# Altium PCB driverv7-FPGA.PcbDoc
Units mm, origin at the board's own origin, x right, y up, seen from the top; angles counter-clockwise.
Board outline 31.75 x 21.95 mm, 2 copper layers (Top Layer, Bottom Layer); 44 components, 33 nets, 159 pads, 50 vias.
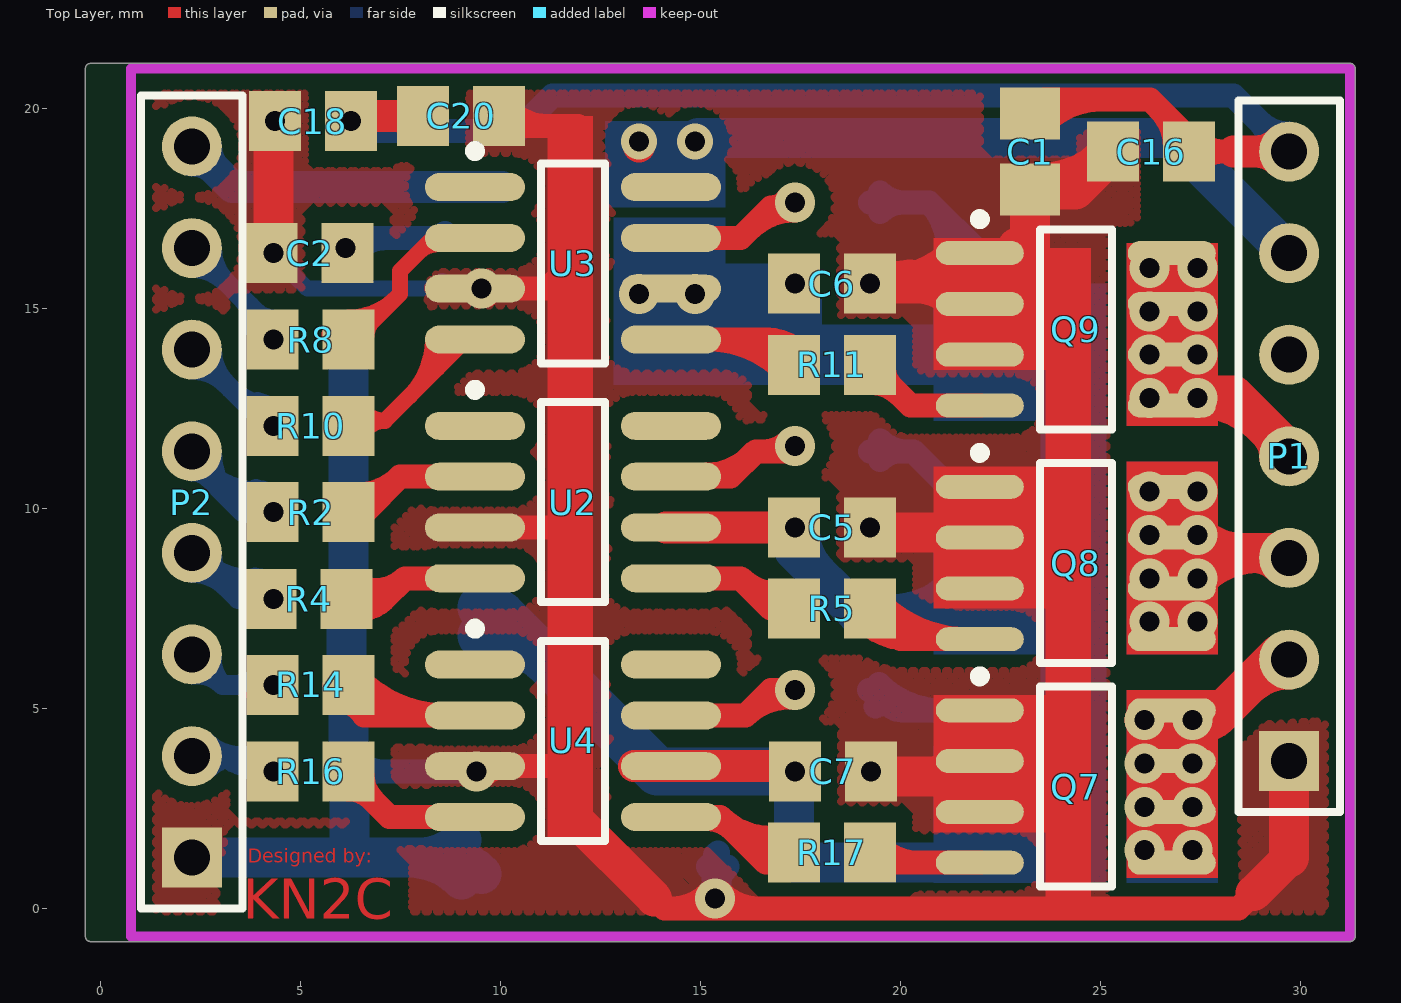
[diagram p0: Top Layer view]
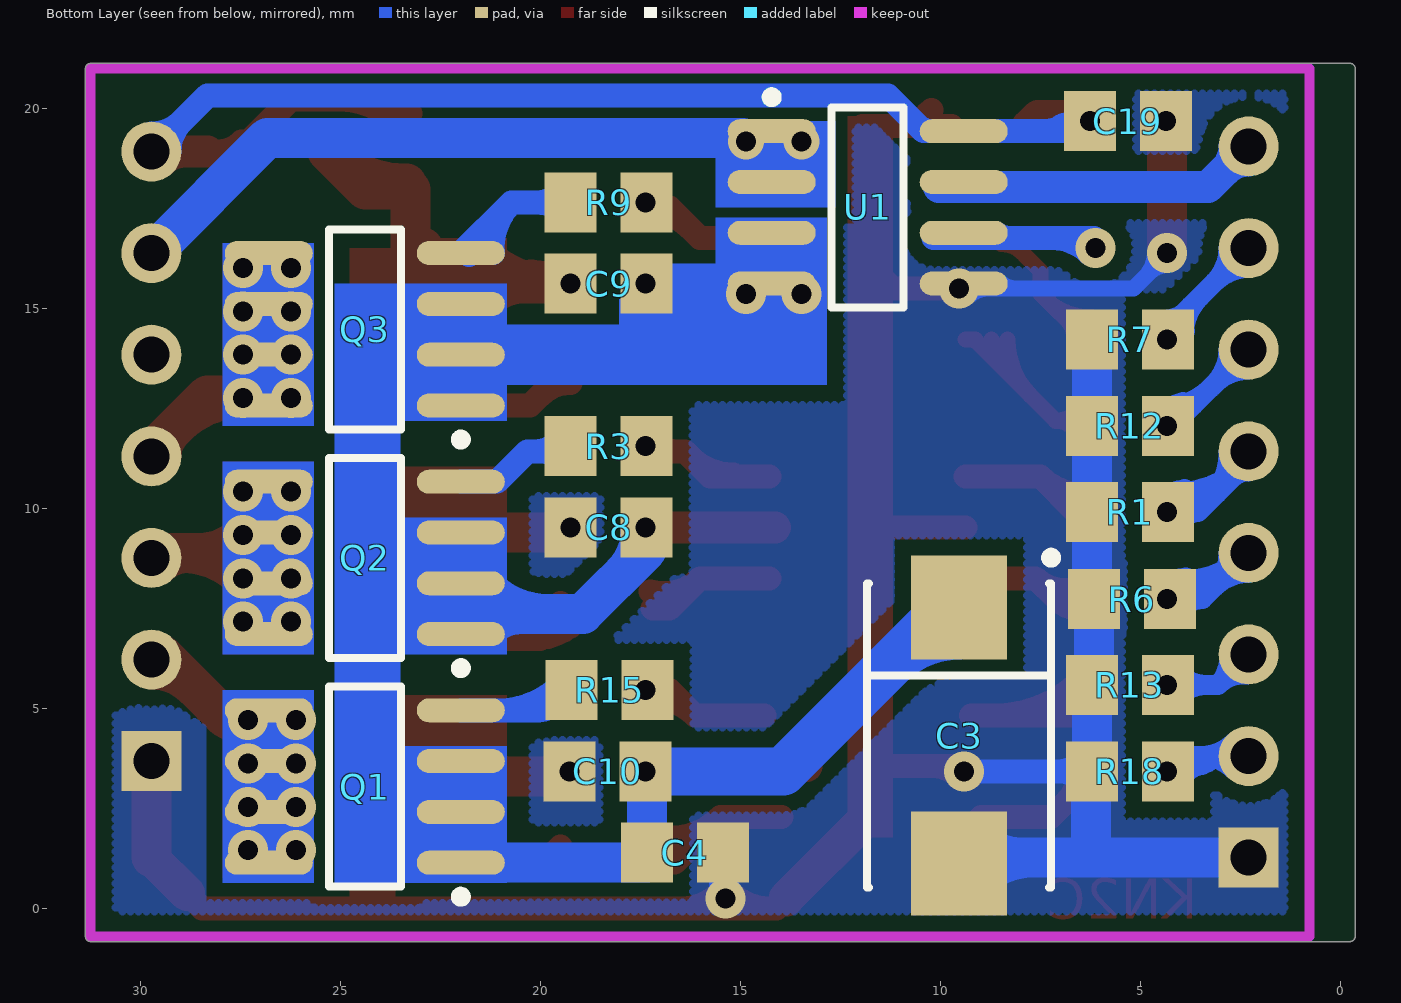
[diagram p1: Bottom Layer view, seen from below]

## Layer stack, top to bottom
Top Solder: solder mask 0.0102, Solder Resist, Dk 3.5
Top Layer: signal copper 0.0356
Dielectric1: dielectric 0.32, FR-4, Dk 4.8
Bottom Layer: signal copper 0.0356
Bottom Solder: solder mask 0.0102, Solder Resist, Dk 3.5

## Board outline
-0.377,-0.7 -0.377,20.955 cw(c-0.25,20.955) -0.375,20.978 -0.375,20.977 cw(c-0.25,21) -0.25,21.127 31.242,21.127 cw(c31.242,21) 31.369,21 31.369,-0.7 cw(c31.242,-0.7) 31.242,-0.827 -0.25,-0.827 cw(c-0.25,-0.7)

## Design rules (kind name [scope] priority, off if disabled: settings)
Clearance Clearance_1 [InPolygon] p1: gap=0.4
Clearance [All] p2: gap=0.2
PolygonConnect [All] p1: connectstyle=Direct reliefconductorwidth=0.254 reliefentries=4 polygonreliefangle="90 Angle" airgapwidth=0.254
RoutingVias [All] p1: holewidth=0.5 width=1 viastyle="Through Hole" minholewidth=0.5 minwidth=1 maxholewidth=0.711 maxwidth=1.27
SolderMaskExpansion [All] p1: expansion=0.102
Width Width_1 [All] p1: maxlimit=3 minlimit=0.2 preferedwidth=0.4
29 further rules are at their usual default settings.

## Components (designator, comment, footprint, x,y, rotation, side; value= is the part's Value field where it differs from the comment)
C1 "Cap_UP" 2012[0805] 23.241,18.923 r270 top
C2 "Cap_UP" 2012[0805] 5.232,16.383 r180 top
C3 "Cap_El_200V" 7343 9.525,4.318 r270 bottom
C4 "Cap_UP" 2012[0805] 16.383,1.397 r0 bottom
C5 "Cap_UP" 2012[0805] 18.288,9.525 r180 top
C6 "Cap_UP" 2012[0805] 18.288,15.621 r180 top
C7 "Cap_UP" 2012[0805] 18.313,3.429 r180 top
C8 "Cap_UP" 2012[0805] 18.288,9.525 r180 bottom
C9 "Cap_UP" 2012[0805] 18.288,15.621 r180 bottom
C10 "Cap_UP" 2012[0805] 18.313,3.429 r180 bottom
C16 "Cap_UP" 2012[0805] 26.264,18.923 r0 top
C18 "Cap_UP" 2012[0805] 5.309,19.685 r0 top
C19 "Cap_UP" 2012[0805] 5.309,19.685 r0 bottom
C20 "Cap_UP" 2012[0805] 9.017,19.812 r180 top
P1 "Header 7" HDR1X7 29.718,3.683 r90 top
P2 "Header 8" HDR1X8 2.286,1.27 r90 top
Q1 "MOSFET-P-8PIN" SO-8_N 24.384,3.048 r0 bottom
Q2 "MOSFET-P-8PIN" SO-8_N 24.384,8.763 r0 bottom
Q3 "MOSFET-P-8PIN" SO-8_N 24.384,14.478 r0 bottom
Q7 "MOSFET-N-8PIN" SO-8_N 24.384,3.048 r0 top
Q8 "MOSFET-N-8PIN" SO-8_N 24.384,8.636 r0 top
Q9 "MOSFET-N-8PIN" SO-8_N 24.384,14.478 r0 top
R1 "Res" 2012[0805] 5.257,9.906 r0 bottom
R2 "Res" 2012[0805] 5.257,9.906 r0 top
R3 "Res" 2012[0805] 18.288,11.557 r0 bottom
R4 "Res" 2012[0805] 5.207,7.735 r0 top
R5 "Res" 2012[0805] 18.288,7.493 r0 top
R6 "Res" 2012[0805] 5.207,7.735 r180 bottom
R7 "Res" 2012[0805] 5.257,14.224 r0 bottom
R8 "Res" 2012[0805] 5.257,14.224 r0 top
R9 "Res" 2012[0805] 18.288,17.653 r0 bottom
R10 "Res" 2012[0805] 5.257,12.065 r0 top
R11 "Res" 2012[0805] 18.288,13.589 r0 top
R12 "Res" 2012[0805] 5.257,12.065 r180 bottom
R13 "Res" 2012[0805] 5.257,5.588 r0 bottom
R14 "Res" 2012[0805] 5.257,5.588 r0 top
R15 "Res" 2012[0805] 18.263,5.461 r0 bottom
R16 "Res" 2012[0805] 5.257,3.429 r0 top
R17 "Res" 2012[0805] 18.288,1.397 r0 top
R18 "Res" 2012[0805] 5.257,3.429 r180 bottom
U1 "ACS712" "8 pin SOIC_N" 11.811,17.526 r180 bottom
U2 "TC4428" "8 pin SOIC_M" 11.811,10.16 r0 top
U3 "TC4428" "8 pin SOIC_M" 11.811,16.129 r0 top
U4 "TC4428" "8 pin SOIC_M" 11.811,4.191 r0 top

## Footprints (in the part's own frame and the unit in brackets; to place one, negate y for a bottom-side part, rotate by r counter-clockwise, add the part's x,y. Pads: shape width x height; smd on the part's side, far side on the other; paste and mask are expansions set on the pad)
"8 pin SOIC_M" [mm] "8-Pin Small Outline Integrated Circuit 1.27 mm Pitch, IPC Low Density"
  oval 2.5x0.7 smd: 1(-2.45,1.905) 2(-2.45,0.635) 3(-2.45,-0.635) 4(-2.45,-1.905) 5(2.45,-1.905) 6(2.45,-0.635) 7(2.45,0.635) 8(2.45,1.905)
  silkscreen extent -2.57,-2.5 0.8,2.93, body extent -2,-2.5 2,2.5, height 1.91
"8 pin SOIC_N" [mm] "8-Pin Small Outline Integrated Circuit 1.27 mm Pitch, IPC Medium Density"
  oval 2.2x0.6 smd: 1(-2.4,1.905) 2(-2.4,0.635) 3(-2.4,-0.635) 4(-2.4,-1.905) 5(2.4,-1.905) 6(2.4,-0.635) 7(2.4,0.635) 8(2.4,1.905)
  silkscreen extent -2.53,-2.5 0.9,2.88, body extent -1.95,-2.45 1.95,2.45, height 1.91
2012[0805] [mm] "Chip Resistor; Body 2.0 x 1.3 mm (LxW typ)"
  rect 1.3x1.5 smd: 1(-0.95,0) 2(0.95,0)
  body extent -1.22,-0.75 1.28,0.75, height 0.5
7343 [mm] "Capacitor, SM Tantalum; Body 7.3 x 4.3 mm (LxW typ)"
  rect 2.6x2.4 smd: 1(-3.2,0) 2(3.2,0)
  silkscreen extent -4.57,-2.3 3.8,2.42, body extent -3.9,-2.4 3.9,2.4, height 2
HDR1X7 [mm]
  rect 1.5x1.5 hole 0.9: 1(0,0)
  round 1.5 hole 0.9: 2(2.54,0) 3(5.08,0) 4(7.62,0) 5(10.16,0) 6(12.7,0) 7(15.24,0)
  silkscreen extent -1.27,-1.27 16.51,1.27
HDR1X8 [mm]
  rect 1.5x1.5 hole 0.9: 1(0,0)
  round 1.5 hole 0.9: 2(2.54,0) 3(5.08,0) 4(7.62,0) 5(10.16,0) 6(12.7,0) 7(15.24,0) 8(17.78,0)
  silkscreen extent -1.27,-1.27 19.05,1.27
SO-8_N [mm] "8-Pin Small Outline Integrated Circuit 1.27 mm Pitch, IPC Medium Density"
  oval 2.2x0.6 smd: 1(-2.4,1.905) 2(-2.4,0.635) 3(-2.4,-0.635) 4(-2.4,-1.905) 5(2.4,-1.905) 6(2.4,-0.635) 7(2.4,0.635) 8(2.4,1.905)
  silkscreen extent -2.52,-2.5 0.9,2.88, body extent -1.95,-2.45 1.95,2.45, height 1.75

## Part data
C1 C2 C3 C4 C5 C6 C7 C8 C9 C10 C16 C18 C19 C20: "Capacitor"
P1: "Header, 7-Pin"
P2: "Header, 8-Pin"
Q1 Q2 Q3: "P-Channel MOSFET"
Q7 Q8 Q9: "N-Channel MOSFET"
R1 R2 R3 R4 R5 R6 R7 R8 R9 R10 R11 R12 R13 R14 R15 R16 R17 R18: "Semiconductor Resistor"
U2 U3 U4: "Dual MOSFET Driver"

## Via types
v1: diameter 1, hole 0.5, Top Layer to Bottom Layer, 48 vias
v2: diameter 0.9, hole 0.5, Top Layer to Bottom Layer, 2 vias

## Nets (pads, with @x,y where several pads share a name; then routed paths per layer and width w, separated by ;. In a path a pad name is that pad's centre, name@x,y a point inside that pad or via, vN(x,y) a via of type N, cw(c..) or ccw(c..) an arc to the next point about the centre after c; other vN are vias at no path point)
AGND: C1.2 C2.2 C3.2 C4.1 C5.1 C6.1 C7.1 C8.1 C9.1 C10.1 C16.1 C18.1 C19.1 C20.1 P1.1 P2.1 Q7.1 Q7.2 Q7.3 Q8.1 Q8.2 Q8.3 Q9.1 Q9.2 Q9.3 R1.2 R6.1 R7.2 R12.1 R13.2 R18.1 U1.5 U2.3 U3.3 U4.3 | length 119
  Top Layer w0.6: U4.3@9.287,3.556 11.43,3.556 ; U2.3 11.811,9.525 ; U4.3@9.539,3.288 cw(c10.187,2.64) U4.3@10.187,3.556 ; U3.3@9.652,15.322 9.824,15.494 11.176,15.494 11.811,16.129 ; C20.1@9.713,19.558 11.938,19.558 ; C20.1@10.214,19.959 ccw(c11.184,20.929) 11.184,19.558 ; 11.811,2.286 11.811,16.129 ; 11.811,18.542 11.811,16.129 ; 13.843,0.254 14.097,0 28.448,0 28.829,0.381 ; 14.271,0 ccw(c14.271,1.35) v1@15.226,0.395 ; v1@15.508,0.395 ccw(c16.463,1.35) 16.463,0 ; 24.13,1.016 24.13,2.286
  Top Layer w0.9: 11.811,2.286 13.843,0.254 ; 28.829,0.381 29.718,1.27
  Top Layer w1: C2.2@4.332,16.51 C18.1@4.332,19.431 ; C7.1@19.238,3.302 22.098,3.302 ; C5.1@19.238,9.398 21.857,9.398 Q8.2 ; v1(19.238,15.621) 22.352,15.621 ccw(c22.352,15.047) Q9.2@21.787,15.148 ; C6.1@19.313,15.851 ccw(c19.919,16.901) 20.233,15.73 ; C6.1@19.827,15.621 ccw(c19.827,17.74) Q9.1@21.325,16.242 ; 20.44,15.621 cw(c20.44,14.369) Q9.2@21.325,15.254 ; 20.747,3.302 ccw(c20.747,4.12) Q7.2@21.325,3.542 ; Q9.1@22.925,16.242 ccw(c22.164,17.003) 23.241,17.003 ; Q9.1@22.925,16.524 cw(c22.164,15.763) 23.241,15.763 ; 23.114,15.748 23.241,15.875 C1.2 ; C1.2@23.343,18.123 ccw(c23.382,20.855) C16.1 24.364,17.973 C1.2 ; C16.1@25.197,18.916 cw(c23.241,20.471) C1.2 ; 29.718,1.27 P1.1
  Bottom Layer w0.4: v1@4.282,16.383 5.171,15.494 U1.5@9.353,15.494 ; v1@4.332,16.083 cw(c4.332,15.479) 4.759,15.906 ; v1@4.632,16.383 ccw(c5.477,16.383) 4.88,15.786 ; 8.063,15.494 ccw(c8.063,16.169) U1.5@8.54,15.692 ; v1@9.313,15.282 ccw(c8.801,14.77) 8.801,15.494 ccw(c8.801,16.218) U1.5@9.313,15.706
  Bottom Layer w0.6: R18.1@6.223,3.429 v1@9.234,3.429 ; R18.1@6.455,3.182 cw(c7.052,2.584) 7.052,3.429 cw(c7.052,4.274) R18.1@6.455,3.676 ; C4.1@15.186,1.05 cw(c14.747,0.611) v1@15.367,0.611 ; v1@15.226,0.396 ccw(c14.955,0.667) C4.1@15.325,0.766 ; v1(15.367,0.254) 15.367,1.331 C4.1 ; v1@15.367,0.293 cw(c16.437,0.293) C4.1@15.68,1.05 ; C4.1@15.489,0.746 ccw(c15.988,0.613) v1@15.54,0.354
  Bottom Layer w1: P2.1 6.223,1.27 ; R18.1 R13.2 6.157,5.638 R6.1 6.157,7.874 6.207,7.924 R1.2 R12.1 R7.2 ; R18.1@6.223,3.429 6.223,1.27 ; 7.71,1.27 cw(c7.71,-0.597) C3.2@9.03,0.723 ; 7.961,1.27 ccw(c7.961,2.782) C3.2@9.03,1.713 ; C3.2@9.525,0.864 ccw(c8.545,-0.116) 8.545,1.27 6.223,1.27
  other v1: 9.398,3.429 19.263,3.429 19.238,9.525 9.525,15.494 4.332,16.383 4.359,19.685
M1N: P2.6 R10.1 R12.2 | length 7.3
  Bottom Layer w0.5: P2.6@2.286,13.47 cw(c2.286,12.263) 3.14,13.116 cw(c3.993,13.97) P2.6@2.786,13.97 ; P2.6 R12.2@4.191,12.065 ; 3.255,13.001 ccw(c4.307,14.052) R12.2@4.307,12.565 ; R12.2@3.665,12.591 ccw(c4.332,13.259) R12.2@4.332,12.315 ; R12.2@3.929,12.666 cw(c3.665,11.682) R12.2@4.549,12.19
  other v1: 4.332,12.065
M1N_IN: R10.2 U3.4 | length 7.8
  Top Layer w0.4: R10.2@6.152,12.192 7.112,12.192 ; R10.2@6.552,12.454 ccw(c7.112,12.921) 7.112,12.192 ; R10.2@6.578,11.911 cw(c7.112,11.545) 7.112,12.192 ; 7.722,12.802 ccw(c6.3,14.224) U3.4@8.311,14.224 ; 8.405,13.485 ccw(c7.666,14.224) U3.4@8.711,14.224 ; U3.4@9.088,14.168 ccw(c9.031,14.224) U3.4@9.111,14.224 ; U3.4 9.144,14.224 7.112,12.192
M1N_OUT: Q9.4 R11.2 | length 4.5
  Top Layer w0.6: R11.2@19.238,13.139 cw(c19.238,12.053) 20.006,12.821 ; R11.2 20.254,12.573 Q9.4 ; R11.2@19.588,13.489 ccw(c20.192,13.489) R11.2@19.765,13.062
M1P: P2.7 R7.1 R8.1 | length 8.8
  Bottom Layer w0.5: P2.7@2.286,16.01 cw(c2.286,14.803) 3.14,15.656 cw(c3.993,16.51) P2.7@2.786,16.51 ; P2.7 4.332,14.464 v1(4.332,14.224) ; 3.508,15.288 cw(c2.543,14.324) R7.1@3.907,14.324 ; 3.736,15.06 cw(c2.899,14.224) R7.1@4.082,14.224 ; R7.1@3.876,14.438 ccw(c4.562,14.622) R7.1@4.207,14.007 ; R7.1@3.906,14.89 ccw(c4.307,15.291) R7.1@4.307,14.724 ; R7.1@4.072,14.787 cw(c3.888,14.1) R7.1@4.573,14.291
M1P_IN: R8.2 U3.2 | length 7.1
  Top Layer w0.4: R8.2@6.207,14.774 ccw(c6.207,16.447) 7.39,15.264 ; R8.2@6.477,14.351 7.493,15.367 7.493,15.942 8.315,16.764 U3.2@9.284,16.764 ; R8.2@6.657,14.324 cw(c7.157,14.324) R8.2@6.803,14.677 ; 7.956,16.405 cw(c8.461,15.899) U3.2@8.461,16.614
  Top Layer w0.6: R8.2@5.826,14.351 R8.2@6.502,14.351
M1P_OUT: Q3.4 R9.2 | length 6.4
  Bottom Layer w0.6: R9.2 20.714,17.653 ; R9.2@19.485,17.406 cw(c20.083,16.808) 20.083,17.653 cw(c20.083,18.498) R9.2@19.485,17.9 ; Q3.4@21.184,16.383 ccw(c19.568,16.507) 20.714,17.653 ; 21.637,16.73 cw(c21.282,16.375) Q3.4@21.782,16.337 ; Q3.4 20.714,17.653
M2N: P2.4 R4.1 R6.2 | length 11.9
  Top Layer w0.8: R4.1@4.14,7.735 R4.1
  Bottom Layer w0.5: P2.4@2.286,8.39 cw(c2.286,7.183) 3.14,8.036 cw(c3.993,8.89) P2.4@2.786,8.89 ; 3.008,8.168 ccw(c4.08,9.24) R6.2@4.27,7.736 ; R6.2@3.715,7.812 ccw(c3.8,8.436) R6.2@4.181,7.934 ; R6.2@3.752,7.807 cw(c3.673,7.235) R6.2@4.133,7.584 ; R6.2@3.858,8.28 cw(c3.719,7.27) R6.2@4.531,7.886 ; R6.2@3.941,7.49 ccw(c3.441,7.103) 3.441,7.735 ; R6.2@3.941,7.98 cw(c3.441,8.367) 3.441,7.735 ; R6.2@4.155,7.558 ccw(c3.728,7.131) 3.728,7.735 ccw(c3.728,8.339) R6.2@4.155,7.912 ; R6.2@4.207,8.232 cw(c3.918,10.522) P2.4 3.441,7.735 ; v1(4.332,7.735) R6.2 3.441,7.735
M2N_IN: R4.2 U2.4 | length 7.2
  Top Layer w0.6: R4.2@6.019,7.626 ccw(c6.489,8.337) 7.091,7.735 ; R4.2 7.091,7.735 ; R4.2@6.35,8.127 ccw(c6.902,8.964) 7.611,8.255 ; R4.2@6.405,7.488 cw(c7.002,6.89) 7.002,7.735 cw(c7.002,8.58) R4.2@6.405,7.982 ; U2.4@9.234,8.255 7.611,8.255 ; 7.091,7.735 7.611,8.255
M2N_OUT: Q8.4 R5.2 | length 8.1
  Top Layer w0.6: R5.2@19.061,7.216 ccw(c20.233,8.388) 20.233,6.731 ; R5.2 20,6.731 ; R5.2@19.24,7.043 cw(c19.247,5.978) 20,6.731 ; R5.2@19.485,7.64 ccw(c21.681,9.836) Q8.4@21.681,6.731 ; R5.2@19.588,7.393 ccw(c20.192,7.393) R5.2@19.765,6.966 ; Q8.4 20,6.731
M2P: P2.5 R1.1 R2.1 | length 13.7
  Bottom Layer w0.5: P2.5@2.286,10.93 cw(c2.286,10.336) 2.706,10.756 ; P2.5 P2.5@2.286,11.176 ; 2.712,10.744 cw(c2.242,8.555) 4.122,9.77 ccw(c3.627,9.45) R1.1@3.751,10.027 ; P2.5@2.786,11.43 ccw(c4.606,11.43) 3.319,10.143 ; 3.082,10.38 ccw(c4.23,11.528) R1.1@4.312,9.906 ; R1.1@3.731,10.031 ccw(c3.861,10.634) R1.1@4.196,10.116 ; R1.1@3.892,10.49 cw(c3.676,9.482) R1.1@4.542,10.042 ; R1.1@3.975,9.683 ccw(c3.556,9.401) 3.556,9.906 ; R1.1@3.975,10.129 cw(c3.556,10.411) 3.556,9.906 ; R1.1@4.155,9.729 ccw(c3.728,9.302) 3.728,9.906 ccw(c3.728,10.51) R1.1@4.155,10.083 ; R1.1@4.287,10.405 cw(c4.154,13.044) P2.5@2.286,11.176 ; v1(4.332,9.906) 3.556,9.906 ; P2.5@2.286,11.176 3.556,9.906
M2P_IN: R2.2 U2.2 | length 4.9
  Top Layer w0.6: R2.2 6.604,9.906 7.493,10.795 ; R2.2@6.244,10.354 ccw(c6.407,11.88) 7.493,10.795 ; U2.2 7.493,10.795
M2P_OUT: Q2.4 R3.2 | length 4.4
  Bottom Layer w0.6: R3.2@19.238,11.43 20.32,11.43 21.082,10.668 Q2.4 ; R3.2@19.485,11.21 cw(c20.018,10.677) 20.018,11.43 ; R3.2@19.485,11.704 ccw(c20.148,12.367) 20.148,11.43
M3N: P2.2 R16.1 R18.2 | length 8
  Bottom Layer w0.5: P2.2 3.951,3.81 v1(4.332,3.429) ; P2.2@2.64,3.456 cw(c3.493,2.603) 3.493,3.81 cw(c3.493,5.017) P2.2@2.64,4.164 ; P2.2@2.663,3.81 cw(c2.663,1.885) R18.2@4.024,3.246 ; P2.2@2.809,3.81 cw(c2.809,1.906) R18.2@4.155,3.252 ; 3.317,3.654 ccw(c3.77,4.438) R18.2@4.21,3.647
M3N_IN: R16.2 U4.4 | length 4.9
  Top Layer w0.6: R16.2@6.087,3.429 7.23,2.286 ; R16.2@6.207,2.979 cw(c6.207,2.182) R16.2@6.77,2.746 ; R16.2 R16.2@6.493,3.429 ; R16.2@6.557,3.329 ccw(c7.45,3.329) R16.2@6.819,2.697 ; 7.357,2.286 U4.4@8.98,2.286
M3N_OUT: Q7.4 R17.2 | length 3.9
  Top Layer w0.6: R17.2@19.238,1.27 19.365,1.143 Q7.4 ; R17.2@19.485,1.544 ccw(c20.455,2.514) 20.455,1.143
M3P: P2.3 R13.1 R14.1 | length 6.8
  Top Layer w0.8: R14.1@4.053,5.334 R14.1
  Bottom Layer w0.5: P2.3 3.048,5.588 ; P2.3@2.328,5.852 cw(c2.404,4.944) 3.048,5.588 ; P2.3@2.784,6.308 ccw(c3.692,6.232) 3.048,5.588 ; R13.1@4.024,5.305 ccw(c3.341,4.622) 3.341,5.588 ccw(c3.341,6.554) R13.1@4.024,5.871 ; R13.1@4.155,5.411 ccw(c3.728,4.984) 3.728,5.588 ccw(c3.728,6.192) R13.1@4.155,5.765 ; v1(4.332,5.588) R13.1 3.048,5.588
M3P_IN: R14.2 U4.2 | length 8
  Top Layer w0.6: R14.2@5.851,5.588 6.613,4.826 cw(c6.932,5.145) R14.2@6.523,5.338 ; R14.2@6.03,5.311 ccw(c7.202,6.483) 7.202,4.826 ; R14.2 R14.2@6.232,5.588 ; R14.2@6.455,5.735 ccw(c8.65,7.931) U4.2@8.65,4.826 ; 6.588,4.826 U4.2@9.234,4.826
M3P_OUT: Q1.4 R15.2 | length 6.2
  Bottom Layer w0.6: R15.2 19.538,5.461 20.046,4.953 ; R15.2@19.378,5.052 cw(c19.645,4.552) 20.046,4.953 ; R15.2@19.461,5.608 ccw(c21.043,7.191) Q1.4@21.043,4.953 ; R15.2@19.561,5.394 ccw(c20.046,5.44) 20.046,4.953 ; Q1.4 20.046,4.953
NetC2_1: C2.1 U1.6 | length 5.9
  Bottom Layer w0.6: v1@6.157,16.764 U1.6@10.16,16.764 ; v1@6.182,16.383 6.563,16.764 ; v1@6.262,16.369 cw(c7.217,15.414) 7.217,16.764 ; 8.304,16.764 ccw(c8.304,17.198) U1.6@8.611,16.891
  other v1: 6.121,16.51
NetR3_1: R3.1 U2.7 | length 5.3
  Top Layer w0.6: U2.7 15.748,10.795 16.383,11.43 v1@17.338,11.43 ; U2.7@15.161,10.845 ccw(c15.161,12.383) 16.248,11.295 ; 16.574,11.43 ccw(c16.574,12.346) v1@17.222,11.698
  other v1: 17.363,11.557
NetR5_1: R5.1 U2.5 | length 4.6
  Top Layer w0.6: U2.5 16.002,8.255 ; R5.1@17.187,7.493 16.764,7.493 16.002,8.255 ; R5.1@17.243,7.93 cw(c16.9,9.153) 16.002,8.255
NetR9_1: R9.1 U3.7 | length 4.9
  Top Layer w0.6: U3.7@14.515,16.764 16.002,16.764 16.764,17.526 ; 16.216,16.978 cw(c17.363,15.831) v1@17.363,17.453 ; v1@17.195,17.761 cw(c16.764,18.038) 16.764,17.526 ; v1@17.272,17.526 16.764,17.526
  other v1: 17.363,17.653
NetR11_1: R11.1 U3.5 | length 6.3
  Top Layer w0.6: U3.5@14.388,14.224 16.703,14.224 R11.1 ; U3.5@15.201,14.224 cw(c15.201,11.552) R11.1@17.091,13.442 ; 16.65,14.224 cw(c16.65,13.001) R11.1@17.515,13.866
NetR15_1: R15.1 U4.7 | length 4.6
  Top Layer w0.6: U4.7@14.388,4.826 16.129,4.826 ; v1@17.344,5.262 ccw(c17.198,3.757) 16.129,4.826 ; v1(17.363,5.461) 16.764,5.461 16.129,4.826
NetR17_1: R17.1 U4.5 | length 7.1
  Top Layer w0.6: U4.5@13.97,2.286 U4.5@15.494,2.286 ; U4.5@15.161,2.236 cw(c15.161,1.311) 15.815,1.965 ; 16.215,1.565 ccw(c17.073,2.423) R17.1@17.407,1.257 ; 16.637,1.143 U4.5@15.494,2.286 ; R17.1@17.242,1.833 cw(c16.752,3.544) U4.5@15.494,2.286
PHASEA: P1.4 Q3.5 Q3.6 Q3.7 Q3.8 Q9.5 Q9.6 Q9.7 Q9.8 | length 9.2
  Top Layer w1: v1(26.225,12.759) ccw(c26.592,13.273) Q9.5@27.038,12.827 ; Q9.5@27.584,12.773 cw(c27.584,10.863) 28.934,12.214 ; 29.065,12.083 ccw(c27.432,10.45) v1(27.432,12.759) ccw(c27.276,12.081) Q9.5 Q9.5@27.038,12.827 ; 29.201,11.947 cw(c28.558,11.303) P1.4@29.468,11.303 ; P1.4@29.718,11.43 28.321,12.827 Q9.5@27.038,12.827
  other v1: 26.225,13.843 27.432,13.843 26.225,14.927 27.432,14.927 26.225,16.01 27.432,16.01
PHASEB: P1.3 Q2.5 Q2.6 Q2.7 Q2.8 Q8.5 Q8.6 Q8.7 Q8.8 | length 13.4
  Top Layer w1: v1(26.225,8.255) cw(c27.758,6.722) 27.758,8.89 ; v1(26.225,9.339) ccw(c27.309,10.422) v1@27.309,8.89 ; v1@26.467,8.413 cw(c26.863,7.808) v1(27.432,8.255) ; Q8.7@27.443,9.13 ccw(c28.021,9.708) 28.021,8.89 ; 28.515,8.89 cw(c28.515,10.422) v1(27.432,9.339) cw(c26.67,9.761) 26.67,8.89 ; 28.808,8.89 cw(c28.808,7.853) P1.3@29.541,8.586 ; 28.965,8.89 ccw(c28.965,6.722) v1(27.432,8.255) ; P1.3@29.718,8.89 26.67,8.89 ; 26.67,8.89 cw(c26.67,8.115) v1(27.432,8.255)
  other v1: 26.225,7.171 27.432,7.171 26.225,10.422 27.432,10.422
PHASEC: P1.2 Q1.5 Q1.6 Q1.7 Q1.8 Q7.5 Q7.6 Q7.7 Q7.8 | length 9.5
  Top Layer w1: Q7.8@27.584,4.753 ccw(c27.584,5.436) 28.067,4.953 ; 27.898,4.953 ccw(c27.898,4.115) v1(27.305,4.707) ; 27.94,4.953 Q7.8 cw(c26.784,4.278) v1(27.305,4.707) ; 28.187,5.073 cw(c27.305,5.954) v1(27.305,4.707) ; 28.641,5.527 cw(c29.718,4.45) P1.2@29.718,5.973 ; P1.2@29.718,6.35 29.464,6.35 27.94,4.826 cw(c27.536,5.23) v1(27.305,4.707) ; v1(26.098,4.707) cw(c26.691,4.115) 26.691,4.953 ccw(c26.691,4.115) v1(26.098,4.707)
  other v1: 26.098,1.456 27.305,1.456 26.098,2.54 27.305,2.54 26.098,3.624 27.305,3.624
VCC: C1.1 C16.2 C18.2 C19.2 C20.2 P1.7 U1.8 | length 44.6
  Top Layer w0.6: C1.1 23.595,20.227 26.235,20.227 27.539,18.923 28.321,18.923 ; C1.1@23.588,19.626 cw(c25.041,18.173) 25.041,20.227 ; 26.457,20.005 cw(c25.476,19.023) C16.2@26.864,19.023 ; C16.2@27.462,18.676 cw(c28.059,18.078) 28.059,18.923 cw(c28.059,19.768) C16.2@27.462,19.17
  Top Layer w0.8: C18.2@6.207,19.812 C20.2@7.432,19.812 ; C18.2@6.33,19.614 cw(c6.807,19.137) C18.2@6.807,19.812 ; C18.2@6.436,19.608 cw(c6.928,19.116) 6.928,19.812 ; C20.2@7.559,19.812 C20.2@7.813,19.558 ; 28.321,18.923 P1.7 ; P1.7@29.471,18.676 ccw(c28.873,18.078) 28.873,18.923 ccw(c28.873,19.768) P1.7@29.471,19.17
  Bottom Layer w0.6: v1(6.259,19.685) 6.477,19.685 6.731,19.431 U1.8 10.414,19.431 11.302,20.319 28.322,20.319 P1.7 ; C19.2@6.375,19.522 cw(c6.707,19.051) 6.995,19.55 ; C19.2@6.4,19.826 ccw(c7.355,20.781) 7.355,19.431 ; C19.2@6.507,19.832 ccw(c7.476,20.802) 7.476,19.431 ; U1.8@10.211,19.431 ccw(c10.211,19.921) 10.558,19.575 ; P1.7@29.268,18.923 ccw(c28.182,18.923) 28.95,19.691 ccw(c29.718,20.459) P1.7@29.718,19.373
VDD: C3.1 C4.2 C5.2 C6.2 C7.2 C8.2 C9.2 C10.2 Q1.1 Q1.2 Q1.3 Q2.1 Q2.2 Q2.3 Q3.1 Q3.2 Q3.3 U1.3 U1.4 U2.6 U3.6 U4.6 | length 51
  Top Layer w0.8: U4.6@13.335,3.556 U4.6 C7.2@17.338,3.556 ; U2.6@14.134,9.525 C5.2 ; 16.694,3.556 cw(c16.694,2.86) C7.2@17.186,3.352 ; C7.2@16.815,3.556 cw(c16.815,2.881) C7.2@17.292,3.358
  Bottom Layer w1: U1.4@14.224,15.621 C9.2 17.338,14.285 17.78,13.843 21.717,13.843 22.098,13.462 ; U1.4@14.224,15.748 U1.4@14.351,15.621 ; U1.4@14.246,15.621 cw(c14.246,14.754) v1(14.859,15.367) cw(c15.472,14.754) 15.472,15.621 ; C4.2@17.333,1.143 Q1.1 ; C4.2 17.333,3.297 17.336,3.429 C10.2@17.338,3.556 ; C8.2@17.338,9.398 17.338,8.959 18.931,7.366 22.606,7.366 ; v1(17.363,9.525) ccw(c18.791,9.525) 17.781,8.516 ; C4.2@17.439,1.403 ccw(c18.067,2.031) 18.067,1.143 ; C8.2@17.488,9.425 ccw(c18.976,9.425) 17.924,8.373 ; 19.827,7.366 ccw(c19.827,9.485) Q2.2@21.325,7.987 ; 20.44,7.366 cw(c20.44,6.114) Q2.1@21.325,6.999 ; v1(13.462,15.367) cw(c14.075,14.754) 14.075,15.621 ccw(c14.075,14.754) v1(13.462,15.367)
  Bottom Layer w1.2: C3.1@9.525,6.818 cw(c9.525,4.377) 11.251,6.103 ; C3.1 cw(c9.525,6.767) 10.056,7.298 13.925,3.429 17.336,3.429 v1(17.363,3.429)
  other v1: 17.363,15.621
VFB_MOTOR: P2.8 U1.7 | length 9.5
  Bottom Layer w0.8: P2.8@2.286,18.7 cw(c2.286,17.855) 2.883,18.453 cw(c3.481,19.05) P2.8@2.636,19.05 ; P2.8 3.302,18.034 U1.7@10.033,18.034
VMOTOR: P1.6 U1.1 U1.2 | length 17.5
  Top Layer w0.8: v2@13.462,19.05 v2(13.462,19.177)
  Bottom Layer w1: U1.2@14.859,18.034 v2(14.859,19.177) ; v2@14.859,19.05 U1.1@15.074,19.265 ; U1.1@14.947,19.265 U1.1@15.074,19.265 ; P1.6 29.702,16.383 26.82,19.265 U1.1@15.074,19.265
pads on no net: P1.5 U2.1 U2.8 U3.1 U3.8 U4.1 U4.8

## Polygon pours and split planes (outlines as drawn)
AGND on Bottom Layer "AGND" (hatched 90Degree grid 0.2 track 0.2, remove dead copper, pour order 7): -0.254,21 31.242,21 31.242,-0.7 -0.254,-0.7 -0.254,21
AGND on Top Layer "Top Layer-No Net 1" (hatched 45Degree grid 0.2 track 0.2, remove dead copper, pour order 5): 0.762,21 0.934,20.828 31.242,20.828 31.242,-0.7 31.05,-0.508 0.762,-0.508 0.762,21

## Keep-outs
Keep-Out Layer:
  lines w0.254: 0.762,-0.7 31.242,-0.7 31.242,21 0.762,21 0.762,-0.7

## Other copper
Top Layer:
  rectangle net AGND: 11.176,1.778 12.319,18.923
  rectangle net AGND: 11.176,18.669 12.319,19.812
  rectangle net AGND: 23.622,-0.127 24.765,1.016
  rectangle net PHASEC: 25.654,0.762 27.94,5.461
  rectangle net PHASEB: 25.654,6.35 27.94,11.176
  rectangle net PHASEA: 25.654,12.065 27.94,16.637
  rectangle net AGND: 20.828,13.462 23.622,16.764
  rectangle net AGND: 20.828,7.493 23.622,11.049
  rectangle net AGND: 20.828,1.905 23.749,5.334
  rectangle net AGND: 23.622,0.635 24.765,16.51
  pour cut-out: 30.988,20.828 30.861,20.701 30.861,4.699 28.448,4.572 28.575,-0.254 25.146,-0.254 25.146,16.256 25.908,17.018 25.908,20.701 26.035,20.828
  text "Designed by:" at 3.683,1.143 h0.35
  text "KN2C" at 3.556,-0.254 h1
Bottom Layer:
  rectangle net VDD: 18.034,13.081 21.971,14.605
  rectangle net VDD: 12.827,13.081 18.034,15.24
  rectangle net VMOTOR: 12.611,17.526 15.621,19.685
  rectangle net VDD: 12.827,14.605 15.621,17.272
  rectangle net VDD: 20.828,12.192 23.622,15.621
  rectangle net VDD: 20.828,6.35 23.622,9.779
  rectangle net VDD: 20.828,0.635 23.495,4.064
  rectangle net VDD: 23.495,0.508 25.146,15.621
  rectangle net PHASEC: 25.654,0.635 27.94,5.461
  rectangle net PHASEB: 25.654,6.35 27.94,11.176
  rectangle net PHASEA: 25.654,12.065 27.94,16.637

## Silkscreen, mask and mechanical layers (free items; w line width, h text height)
Top Solder:
  rectangle: 20.828,13.462 23.622,16.764
  rectangle: 20.828,1.905 23.622,5.334
  rectangle: 20.828,7.747 23.622,11.049
  rectangle: 25.654,0.635 27.94,5.334
  rectangle: 25.654,6.35 27.94,11.176
  rectangle: 25.654,12.065 27.94,16.637
  lines w1: 26.162,4.953 28.067,4.953 29.337,6.223 29.718,6.223 ; 27.038,12.827 28.321,12.827 29.718,11.43 29.718,11.303 ; 27.813,8.89 29.718,8.89 29.718,8.763
Bottom Solder:
  rectangle: 12.827,14.732 15.621,17.272
  rectangle: 12.611,17.526 15.621,19.685
  rectangle: 25.654,0.762 27.94,5.461
  rectangle: 25.654,6.477 27.94,11.049
  rectangle: 20.828,0.762 23.622,4.191
  rectangle: 20.828,6.35 23.622,9.779
  rectangle: 25.654,12.192 27.94,16.764
  rectangle: 20.828,12.192 23.622,15.621
  lines w1: 14.224,18.923 14.562,19.261 26.824,19.261 29.702,16.383 29.718,16.383 ; 14.351,13.843 23.926,13.843 24.247,13.523 24.247,8.128 ; 21.36,2.413 24.217,2.413 24.384,2.58 24.384,7.991 24.247,8.128 ; 24.247,8.128 21.482,8.128 24.247,8.128